# Altium PCB carrier_card.PcbDoc (part 1 of 2)
Units mil, origin at the board's own origin, x right, y up, seen from the top; angles counter-clockwise.
Board outline 4010 x 3799.91 mil, 4 copper layers (Top Layer, GND, VCC, Bottom Layer), stack 30.634 mil thick; 96 components, 162 nets, 584 pads, 200 vias.
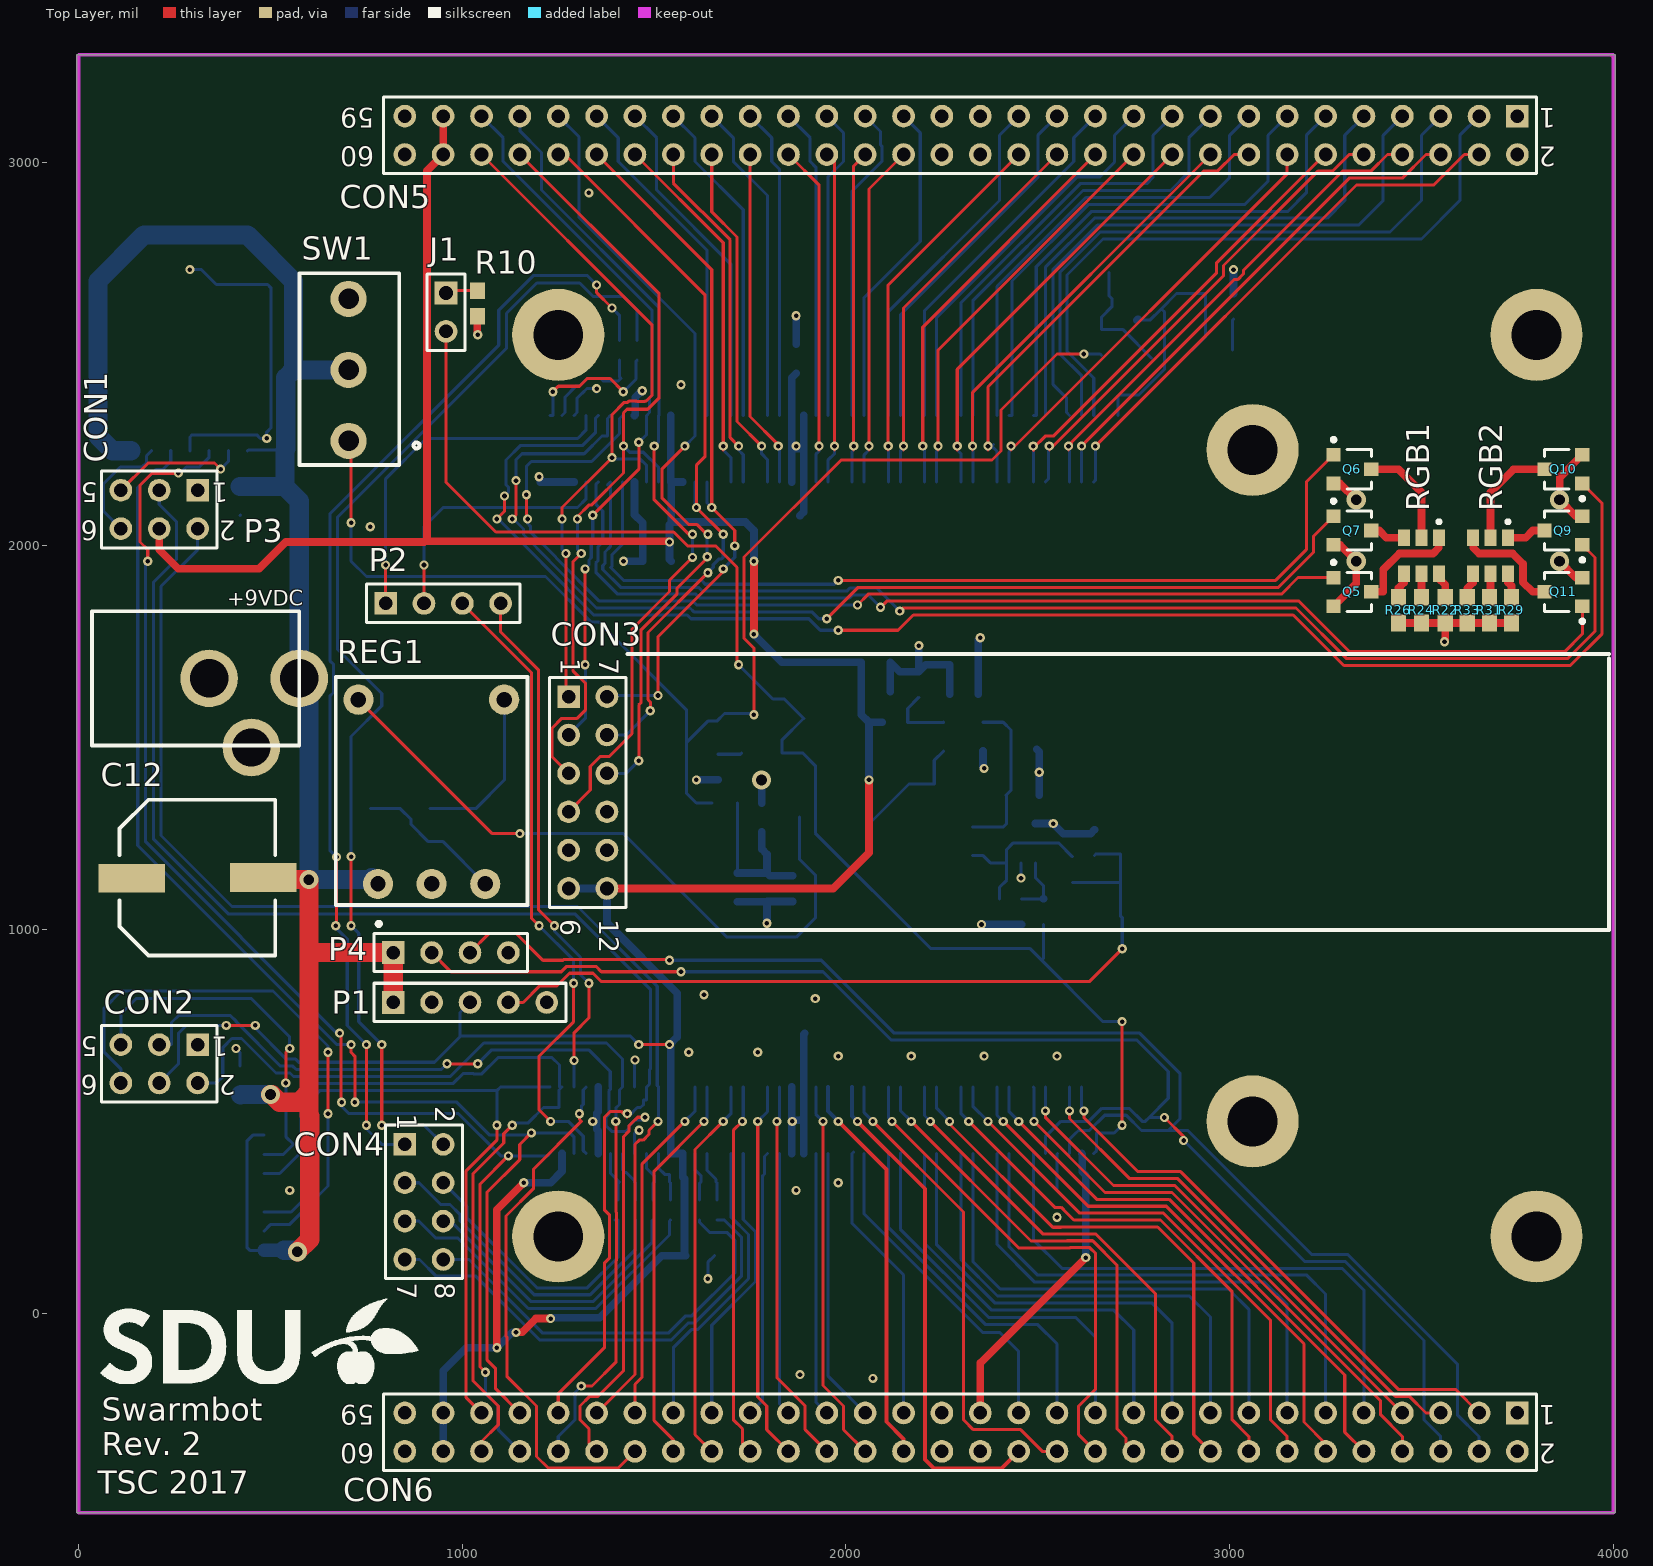
[diagram p0: Top Layer view]
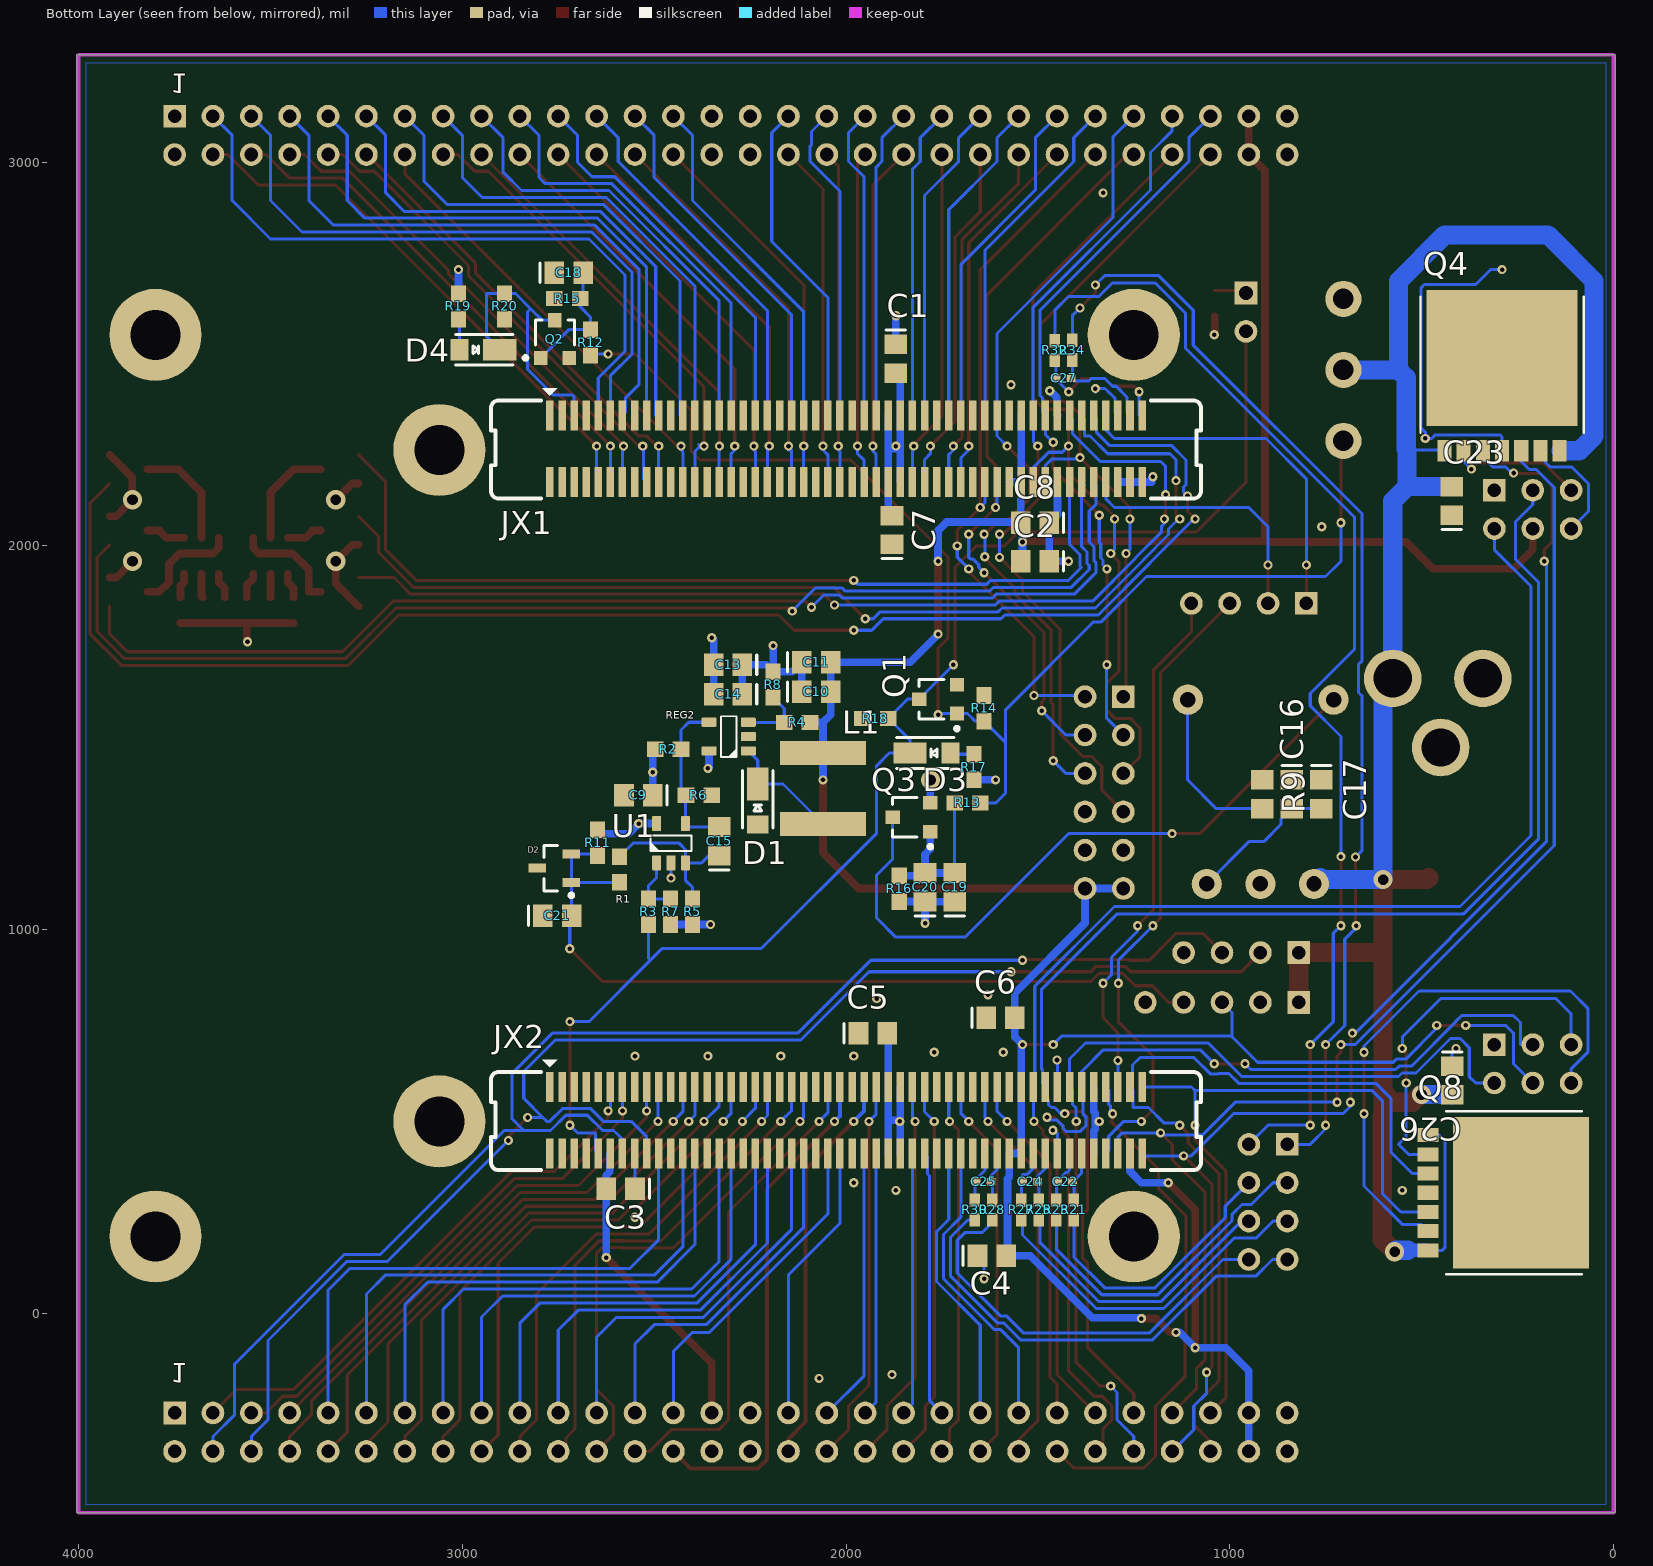
[diagram p1: Bottom Layer view, seen from below]
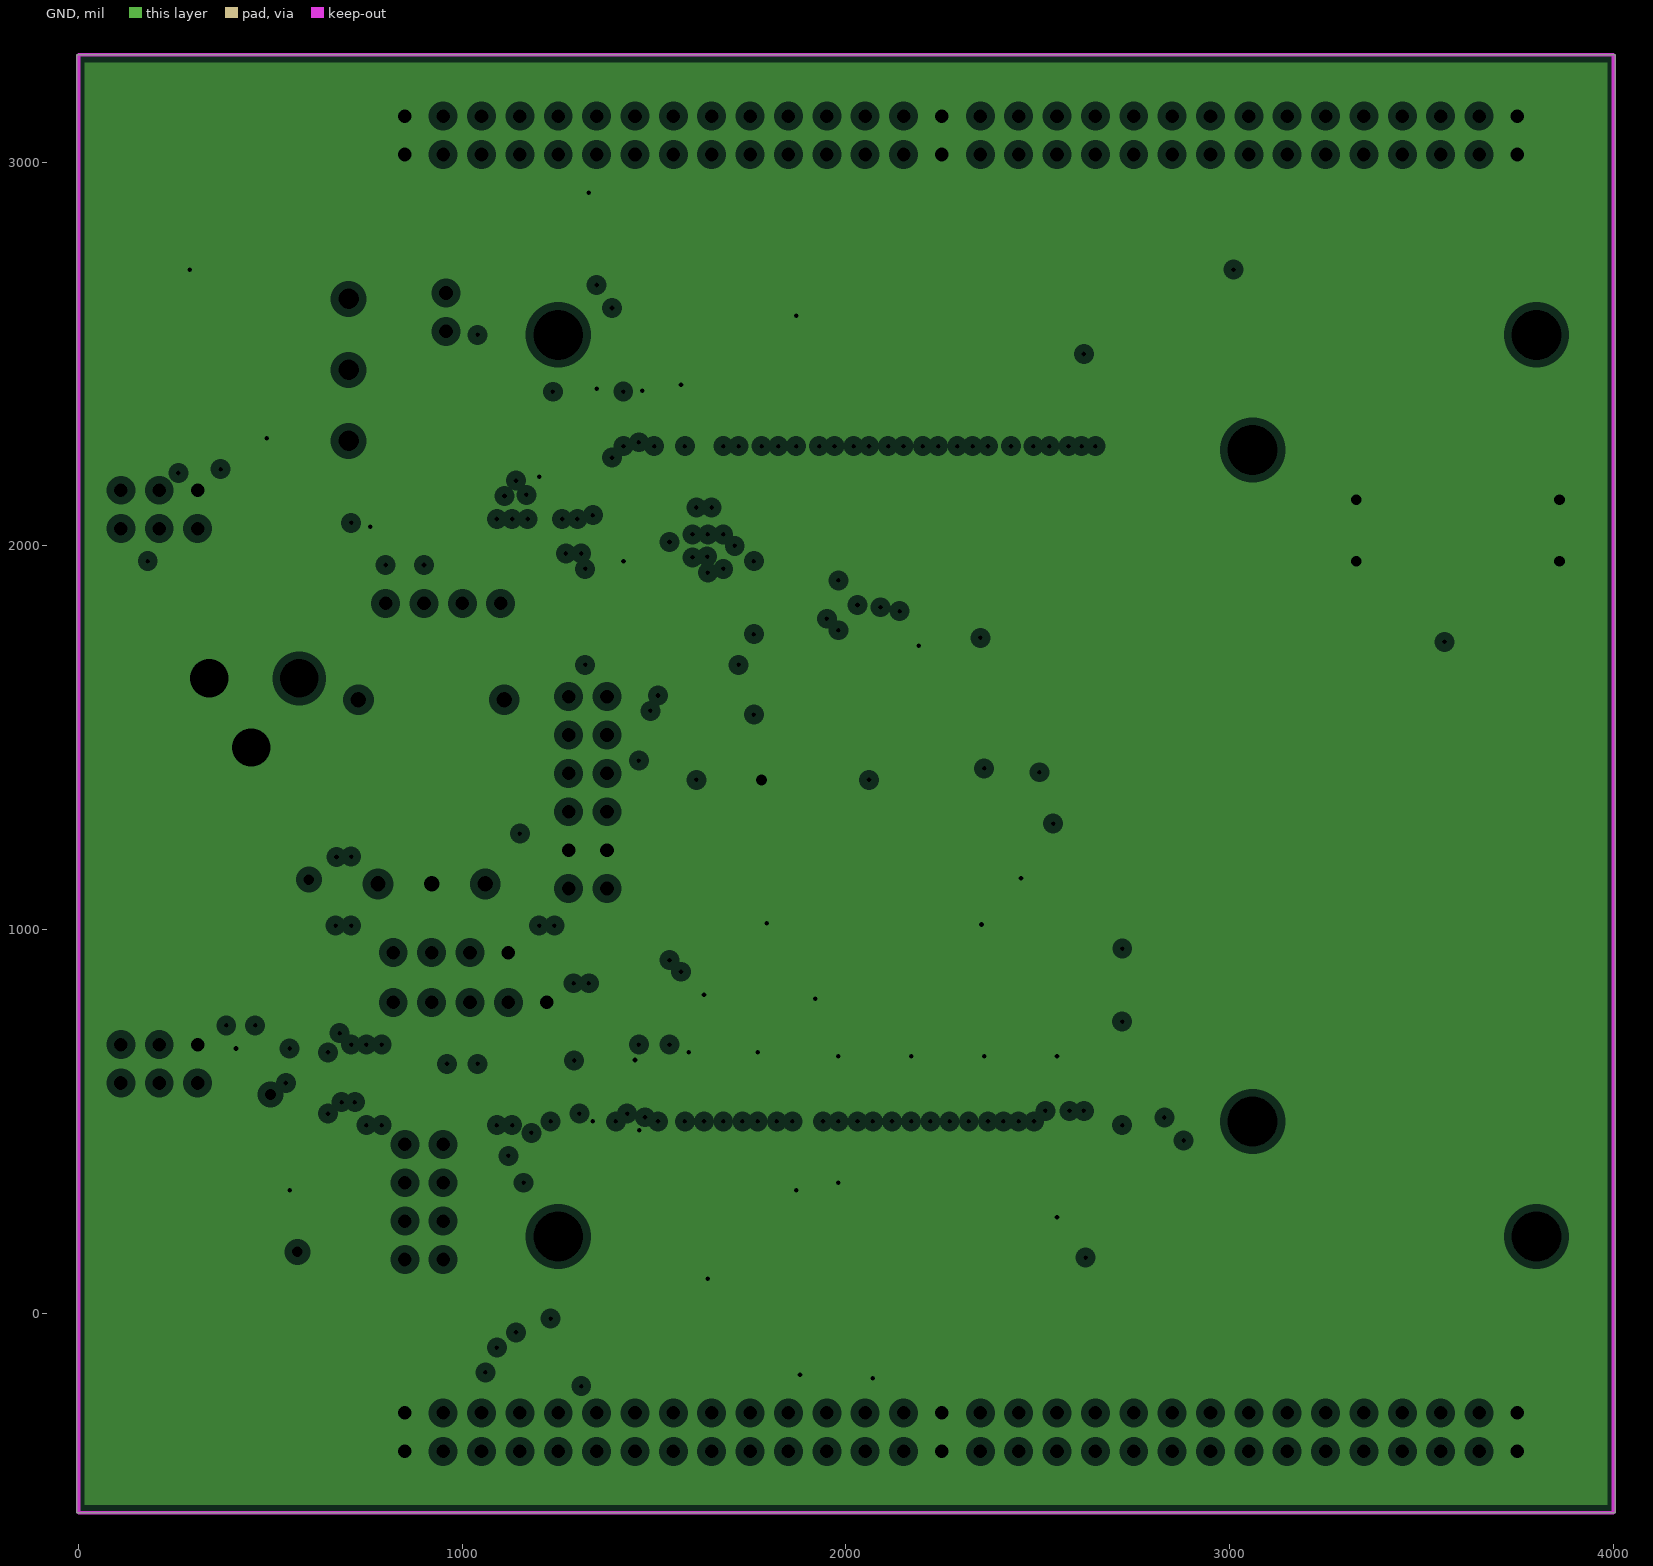
[diagram p2: GND, clearances drawn from the general rule]
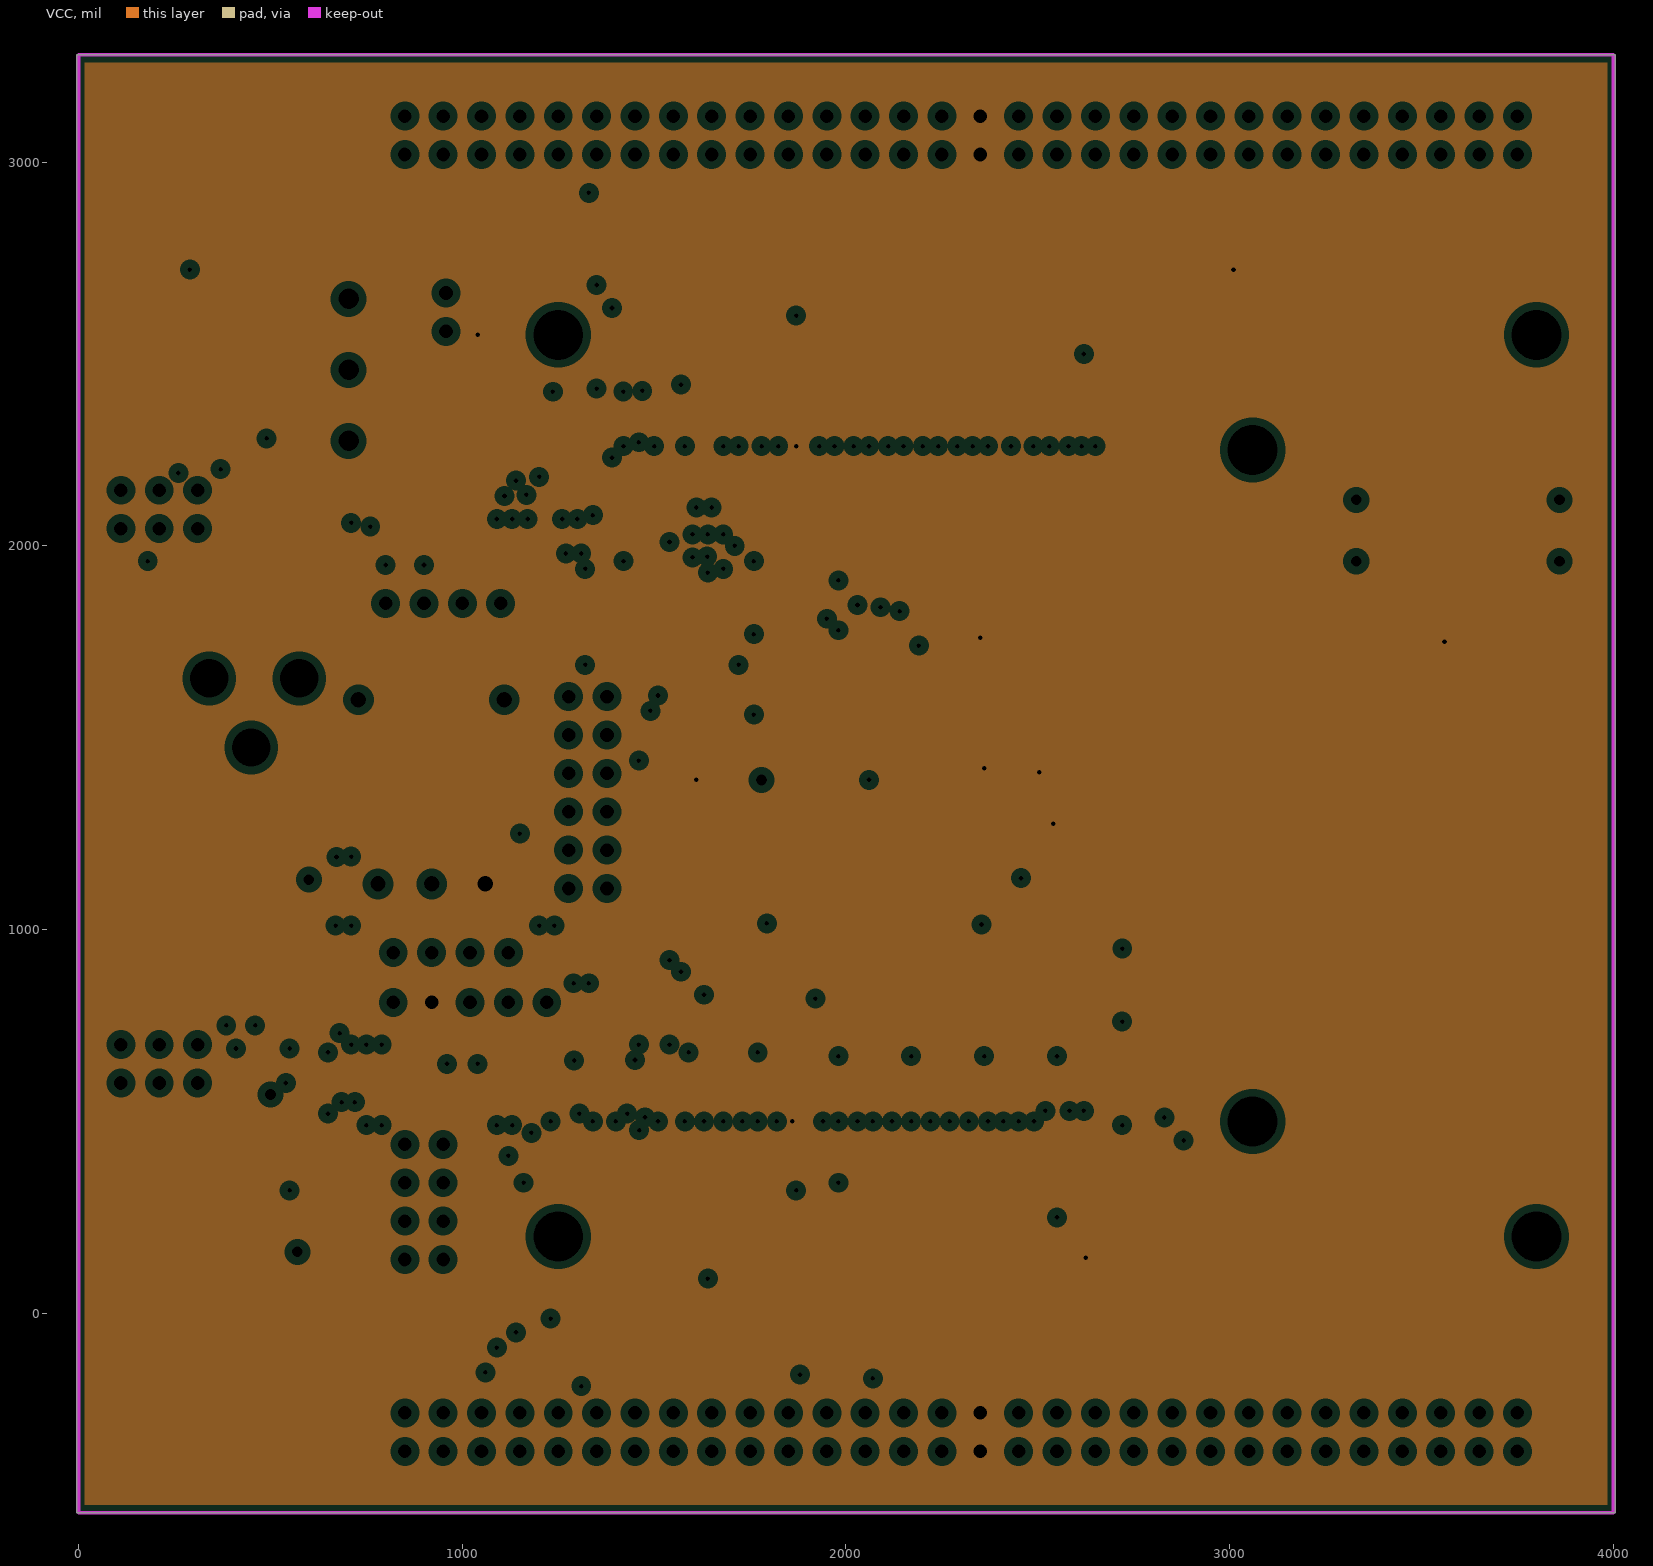
[diagram p3: VCC, clearances drawn from the general rule]

## Layer stack, top to bottom
Top Solder: solder mask 0.4, Solder Resist, Dk 3.5
Top Layer: signal copper 1.4
Dielectric1: core 10, FR-4, Dk 4.2
GND: plane copper 1.417, net GND
Dielectric 3: prepreg 5, Dk 4.2
VCC: plane copper 1.417, net VCC
Dielectric 2: core 10, Dk 4.2
Bottom Layer: signal copper 1.4
Bottom Solder: solder mask 0.4, Solder Resist, Dk 3.5

## Board outline
-5,-520 -5,3279.89 4005,3279.91 4005,-520

## Design rules (kind name [scope] priority, off if disabled: settings)
Clearance [All] p1: gap=10 ignorepadtopadclearanceinfootprint=FALSE except(0: Arc-Hole Track-Hole SMDPad-Hole THPad-Hole Via-Hole Fill-Hole Poly-Hole Region-Hole Text-Hole)
FabricationTestPointUsage TestPointUsage [All] p1: valid=0 allowmultiple=FALSE
FabricationTestpoint Testpoint [All] p1: side=3 testpointundercomponent=TRUE minsize=40 maxsize=100 preferedsize=60 minholesize=0 maxholesize=40 preferedholesize=32 testpointgrid=1 allowsidetop=TRUE allowsidebottom=TRUE usegrid=TRUE gridtolerance=0.01
HoleSize HoleSize_1 [IsVia And InAnyNet And InLayerClass('All Layers')] p1: absolutevalues=TRUE maxlimit=100 minlimit=15 maxpercent=80.000 minpercent=20.000
HoleSize [All] p2: absolutevalues=TRUE maxlimit=150 minlimit=1 maxpercent=80.000 minpercent=20.000
PlaneClearance [All] p1: clearance=20
PlaneConnect [All] p1: planeconnectstyle=Relief reliefexpansion=20 reliefentries=4 reliefconductorwidth=10 reliefairgap=10
PolygonConnect [All] p1: connectstyle=Relief reliefconductorwidth=10 reliefentries=4 polygonreliefangle="90 Angle" airgapwidth=10
RoomDefinition carrier_card_s3 [InComponentClass('carrier_card_s3')] p1 off: confinementstyle=ConfineIn formatcopy=TRUE lockcomponents=FALSE outline -1945.64,-1157.29 7345.7,-1157.29 7345.7,-251.78 -1945.64,-251.78
RoomDefinition carrier_card_s2 [InComponentClass('carrier_card_s2')] p2 off: confinementstyle=ConfineIn formatcopy=TRUE lockcomponents=FALSE outline 3579.53,5587.41 13973.24,5587.41 13973.24,6414.18 3579.53,6414.18
RoomDefinition carrier_card [InComponentClass('carrier_card')] p3 off: confinementstyle=ConfineIn formatcopy=TRUE lockcomponents=FALSE outline 3540.16,75.59 7870.87,75.59 7870.87,5548.04 3540.16,5548.04
RoutingVias RoutingVias_1 [IsVia And InAnyNet And InLayerClass('All Layers')] p1: holewidth=28 width=50 viastyle="Through Hole" minholewidth=28 minwidth=50 maxholewidth=28 maxwidth=50
RoutingVias [All] p2: holewidth=12 width=24 viastyle="Through Hole" minholewidth=12 minwidth=24 maxholewidth=12 maxwidth=24
SilkToSolderMaskClearance SilkscreenOverComponentPads [IsPad] p1: minsilkscreentomaskgap=10 clearancetoexposedcopper=TRUE
SolderMaskExpansion [All] p1: expansion=4
Width [All] p1: maxlimit=50 minlimit=8 preferedwidth=8 minimp=50.000000 maximp=50.000000 favimp=50.000000
24 further rules are at their usual default settings.

## Classes and differential pairs
component class carrier_card_s2: C9 C10 C11 C12 C13 C14 C15 C16 C17 C18 C19 C20 C21 D1 D2 D3 D4 J1 L1 Q1 Q2 Q3 R1 R2 R3 R4 R5 R6 R7 R8 R9 R10 R11 R12 R13 R14 R15 R16 R17 R18 R19 R20 REG1 REG2 SW1 U1
component class carrier_card_s3: C22 C23 C24 C25 C26 C27 P3 P4 Q4 Q5 Q6 Q7 Q8 Q9 Q10 Q11 R21 R22 R23 R24 R25 R26 R27 R28 R29 R30 R31 R32 R33 R34 RGB1 RGB2
component class carrier_card: C1 C2 C3 C4 C5 C6 C7 C8 CON1 CON2 CON3 CON4 CON5 CON6 JX1 JX2 P1 P2

## Components (designator, comment, footprint, x,y, rotation, side; value= is the part's Value field where it differs from the comment)
C1 "C0805" 0805 1870,2487.72 r270 bottom value=22uF
C2 "C0805" 0805 1507.4,1960 r0 bottom value=22uF
C3 "C0805" 0805 2587.4,324.28 r0 bottom value=22uF
C4 "C0805" 0805 1620,150 r180 bottom value=22uF
C5 "C0805" 0805 1930,730 r180 bottom value=100nF
C6 "C0805" 0805 1597.4,770 r180 bottom value=100nF
C7 "C0805" 0805 1880,2041.31 r90 bottom value=100nF
C8 "C0805" 0805 1507.4,2060 r0 bottom value=100nF
C9 "C0805" 0805 2541.28,1350.04 r0 bottom value=100nF
C10 "C0805" 0805 2077.56,1620 r180 bottom value=22uF
C11 "C0805" 0805 2077.56,1697.06 r180 bottom value=100nF
C12 "20SVP150M" 20SVP150M_FP 309.5,1135.5 r180 top value=100pF
C13 "C0805" 0805 2307.4,1690 r0 bottom value=100nF
C14 "C0805" 0805 2307.4,1612.94 r0 bottom value=22uF
C15 "C0805" 0805 2330,1230 r90 bottom value=100nF
C16 "C0805" 0805 838.44,1352.6 r270 bottom value=100nF
C17 "C0805" 0805 761.37,1352.6 r270 bottom value=22uF
C18 "C0805" 0805 2722.6,2711.81 r180 bottom value=100nF
C19 "C0805" 0805 1716.84,1110 r90 bottom value=100nF
C20 "C0805" 0805 1793.9,1110 r90 bottom value=100nF
C21 "C0805" 0805 2752.6,1035.75 r180 bottom value=100nF
C22 "Cap Semi" 0402 1428.86,342.06 r180 bottom value=900pF
C23 "C0805" 0805 421,2116.97 r90 bottom value=100nF
C24 "Cap Semi" 0402 1520.31,342.06 r180 bottom value=900pF
C25 "Cap Semi" 0402 1641.52,342.06 r180 bottom value=900pF
C26 "C0805" 0805 420,606.5 r270 bottom value=100nF
C27 "Cap Semi" 0402 1433.07,2436.47 r0 bottom value=900pF
CON1 "Header 3X2" HDR2X3 310,2145 r180 top
CON2 "Header 3X2" HDR2X3 310,700 r180 top
CON3 "Header 6X2A" HDR2X6_CEN 1277,1607 r270 top
CON4 "Header 4X2 - ADC" HDR2X4 850,440 r270 top
CON5 "Header 30X2" HDR2X30 3750,3120 r180 top
CON6 "Header 30X2" HDR2X30 3750,-260 r180 top
D1 "18TQ045" POWERDI-123 2230,1339.08 r270 bottom
D2 "TL431AIDBZT" SOT-23_N 2760,1160 r0 bottom
D3 "18TQ045" POWERDI-123 1792.91,1459.93 r180 bottom
D4 "18TQ045" POWERDI-123 2942.53,2511 r0 bottom
J1 "Header 2" HDR1X2 957.49,2659 r270 top
JX1 "BERGSTAK 100P" FCI_BERGSTAK_100P 2771.65,2339.85 r180 bottom
JX2 "BERGSTAK 100P" FCI_BERGSTAK_100P 2771.65,589.35 r180 bottom
L1 "2.2uH" SRN5020-2R2Y_FP 2059.85,1274.96 r270 bottom
P1 "Header 5" HDR1X5 820,810 r0 top
P2 "Header 4" HDR1X4 800,1850 r0 top
P3 "dc_jack" "Power Jack" 575,1654.5 r270 top
P4 "Audio Header" HDR1X4 820,940 r0 top
Q1 "BSS138LT1G" SOT-23B 1760,1600.5 r90 bottom
Q2 "BSS138LT1G" SOT-23B 2758.6,2538.98 r180 bottom
Q3 "BSS138LT1G" SOT-23B 1829.21,1292.6 r90 bottom
Q4 "BD6222HFP" HRP7_N 290,2480.16 r180 bottom
Q5 "BSS138LT1G" SOT-23B 3320,1880 r270 top
Q6 "BSS138LT1G" SOT-23B 3320,2200 r270 top
Q7 "BSS138LT1G" SOT-23B 3320,2040 r270 top
Q8 "BD6222HFP" HRP7_N 250.72,313.95 r270 bottom
Q9 "BSS138LT1G" SOT-23B 3870,2040 r90 top
Q10 "BSS138LT1G" SOT-23B 3870,2200 r90 top
Q11 "BSS138LT1G" SOT-23B 3870,1880 r90 top
R1 "1K5" ERA-0603 2590,1156.54 r270 bottom
R2 "3K" ERA-0603 2463.46,1470 r0 bottom
R3 "1K" ERA-0603 2514.76,1046.62 r90 bottom
R4 "45K3" ERA-0603 2127.39,1540 r0 bottom
R5 "1K" ERA-0603 2400,1046.62 r90 bottom
R6 "100K" ERA-0603 2383.46,1350 r0 bottom
R7 "3K74" ERA-0603 2457.38,1046.54 r90 bottom
R8 "10K" ERA-0603 2190,1638.53 r270 bottom
R9 "348R1%" ERA-0805 915.5,1352.6 r270 bottom
R10 "1K" ERA-0603 1039.21,2631.91 r270 top
R11 "1K" ERA-0603 2647.56,1226.54 r90 bottom
R12 "1K" ERA-0603 2665.79,2530 r270 bottom
R13 "1K" ERA-0603 1683.46,1330 r180 bottom
R14 "3K92" ERA-0603 1640,1576.54 r270 bottom
R15 "3K92" ERA-0603 2726.54,2644.59 r180 bottom
R16 "3K92" ERA-0603 1861.12,1106.54 r90 bottom
R17 "220R" ERA-0603 1666.59,1423.46 r90 bottom
R18 "120R" ERA-0603 1923.46,1550 r180 bottom
R19 "680R" ERA-0603 3010,2624.07 r270 bottom
R20 "430R" ERA-0603 2890,2624.07 r90 bottom
R21 "100R" 2-0402 1406.18,268.99 r90 bottom
R22 "85R" ERA-0603 3561.88,1832.29 r270 top
R23 "100R" 2-0402 1451.75,268.99 r90 bottom
R24 "145R" ERA-0603 3500,1832.29 r270 top
R25 "100R" 2-0402 1497.31,268.99 r90 bottom
R26 "85R" ERA-0603 3440,1832.29 r270 top
R27 "100R" 2-0402 1542.88,268.99 r90 bottom
R28 "100R" 2-0402 1618.45,268.99 r90 bottom
R29 "85R" ERA-0603 3734.38,1832.29 r270 top
R30 "100R" 2-0402 1664.02,268.99 r90 bottom
R31 "145R" ERA-0603 3677,1832.29 r270 top
R32 "100R" 2-0402 1455.57,2509.54 r270 bottom
R33 "85R" ERA-0603 3619.26,1832.29 r270 top
R34 "100R" 2-0402 1410,2510.03 r270 bottom
REG1 "PTH08080WAH" PTH08080W_FP 920,1359 r90 top
REG2 "LMR10510XMF" SOT23-5 2305.77,1502.9 r0 bottom
RGB1 "RGB LED" RGB_LED 3500,1974.31 r180 top
RGB2 "RGB LED" RGB_LED 3680,1974.31 r180 top
SW1 "1101M2S3CQE2" 1101M2S3CQE2_FP 703.5,2458.5 r180 top
U1 "TLV2702" SOT23-5 2456,1225 r90 bottom

## Footprints (in the part's own frame and the unit in brackets; to place one, negate y for a bottom-side part, rotate by r counter-clockwise, add the part's x,y. Pads: shape width x height; smd on the part's side, far side on the other; paste and mask are expansions set on the pad)
2-0402 [mm] "Chip Resistor; Body 1 x 0.5 mm (LxW typ)"
  rect 0.9x0.7 smd: 1(-0.65,0) 2(0.65,0)
20SVP150M_FP [mm]
  rect 4.4x1.9 smd: 1(4.35,0.05) 2(-4.35,0)
  silkscreen extent -5.15,-5.15 5.15,5.15
0402 [mm] "Chip Capacitor, Body 1.0x0.5mm, IPC High Density"
  rect 0.6x0.5 smd: 1(-0.5,0) 2(0.5,0)
  body extent -0.55,-0.3 0.55,0.3, height 1.3
0805 [mm] "Chip Capacitor; Body 2.0 x 1.2 mm (LxW typ)"
  rect 1.3x1.5 smd: 1(-0.95,0) 2(0.95,0)
  silkscreen extent -1.9,-0.65 -1.9,0.65
1101M2S3CQE2_FP [mm]
  round 2.4 hole 1.36: 1(0,4.7) 2(0,0) 3(0,-4.7)
  silkscreen extent -4.7,-6.4 3.25,6.3
ERA-0603 [mm] "Chip Resistor; Body 1.6 x 0.8 mm (LxW typ)"
  rect 1.1x1 smd: 1(-0.85,0) 2(0.85,0)
ERA-0805 [mm] "Chip Resistor; Body 2 x 1.3 mm (LxW typ)"
  rect 1.3x1.5 smd: 1(-0.95,0) 2(0.95,0)
FCI_BERGSTAK_100P [mm]
  rect 0.5x2 smd: 1(0,0) 2(0,-4.4) 3(0.8,0) 4(0.8,-4.4) 5(1.6,0) 6(1.6,-4.4) 7(2.4,0) 8(2.4,-4.4) 9(3.2,0) 10(3.2,-4.4) 11(4,0) 12(4,-4.4) 13(4.8,0) 14(4.8,-4.4) 15(5.6,0) 16(5.6,-4.4) 17(6.4,0) 18(6.4,-4.4) 19(7.2,0) 20(7.2,-4.4) 21(8,0) 22(8,-4.4) 23(8.8,0) 24(8.8,-4.4) 25(9.6,0) 26(9.6,-4.4) 27(10.4,0) 28(10.4,-4.4) 29(11.2,0) 30(11.2,-4.4) 31(12,0) 32(12,-4.4) 33(12.8,0) 34(12.8,-4.4) 35(13.6,0) 36(13.6,-4.4) 37(14.4,0) 38(14.4,-4.4) 39(15.2,0) 40(15.2,-4.4) 41(16,0) 42(16,-4.4) 43(16.8,0) 44(16.8,-4.4) 45(17.6,0) 46(17.6,-4.4) 47(18.4,0) 48(18.4,-4.4) 49(19.2,0) 50(19.2,-4.4) 51(20,0) 52(20,-4.4) 53(20.8,0) 54(20.8,-4.4) 55(21.6,0) 56(21.6,-4.4) 57(22.4,0) 58(22.4,-4.4) 59(23.2,0) 60(23.2,-4.4) 61(24,0) 62(24,-4.4) 63(24.8,0) 64(24.8,-4.4) 65(25.6,0) 66(25.6,-4.4) 67(26.4,0) 68(26.4,-4.4) 69(27.2,0) 70(27.2,-4.4) 71(28,0) 72(28,-4.4) 73(28.8,0) 74(28.8,-4.4) 75(29.6,0) 76(29.6,-4.4) 77(30.4,0) 78(30.4,-4.4) 79(31.2,0) 80(31.2,-4.4) 81(32,0) 82(32,-4.4) 83(32.8,0) 84(32.8,-4.4) 85(33.6,0) 86(33.6,-4.4) 87(34.4,0) 88(34.4,-4.4) 89(35.2,0) 90(35.2,-4.4) 91(36,0) 92(36,-4.4) 93(36.8,0) 94(36.8,-4.4) 95(37.6,0) 96(37.6,-4.4) 97(38.4,0) 98(38.4,-4.4) 99(39.2,0) 100(39.2,-4.4)
  silkscreen extent -3.9,-5.5 43.1,1.8
HDR1X2 [mm] "Connector; Header; 2 Position"
  rect 1.5x1.5 hole 0.9: 1(0,0)
  round 1.5 hole 0.9: 2(2.54,0)
  silkscreen extent -1.27,-1.27 3.81,1.27
HDR1X4 [mm] "Connector; Header; 4 Position"
  rect 1.5x1.5 hole 0.9: 1(0,0)
  round 1.5 hole 0.9: 2(2.54,0) 3(5.08,0) 4(7.62,0)
  silkscreen extent -1.27,-1.27 8.89,1.27
HDR1X5 [mm] "Connector; Header; 5 Position"
  rect 1.5x1.5 hole 0.9: 1(0,0)
  round 1.5 hole 0.9: 2(2.54,0) 3(5.08,0) 4(7.62,0) 5(10.16,0)
  silkscreen extent -1.27,-1.27 11.43,1.27
HDR2X3 [mm] "Connector; Header; 3x2 Position"
  rect 1.5x1.5 hole 0.9: 1(0,0)
  round 1.5 hole 0.9: 2(0,2.54) 3(2.54,0) 4(2.54,2.54) 5(5.08,0) 6(5.08,2.54)
  silkscreen extent -1.27,-1.27 6.35,3.81
HDR2X4 [mm] "Connector; Header; 4x2 Position"
  rect 1.5x1.5 hole 0.9: 1(0,0)
  round 1.5 hole 0.9: 2(0,2.54) 3(2.54,0) 4(2.54,2.54) 5(5.08,0) 6(5.08,2.54) 7(7.62,0) 8(7.62,2.54)
  silkscreen extent -1.27,-1.27 8.89,3.81
HDR2X6_CEN [mm] "Connector; Header; 6x2 Position"
  rect 1.5x1.5 hole 0.9: 1(0,0)
  round 1.5 hole 0.9: 2(2.54,0) 3(5.08,0) 4(7.62,0) 5(10.16,0) 6(12.7,0) 7(0,2.54) 8(2.54,2.54) 9(5.08,2.54) 10(7.62,2.54) 11(10.16,2.54) 12(12.7,2.54)
  silkscreen extent -1.27,-1.27 13.97,3.81
HDR2X30 [mm] "Connector; Header; 30x2 Position"
  rect 1.5x1.5 hole 0.9: 1(0,0)
  round 1.5 hole 0.9: 2(0,2.54) 3(2.54,0) 4(2.54,2.54) 5(5.08,0) 6(5.08,2.54) 7(7.62,0) 8(7.62,2.54) 9(10.16,0) 10(10.16,2.54) 11(12.7,0) 12(12.7,2.54) 13(15.24,0) 14(15.24,2.54) 15(17.78,0) 16(17.78,2.54) 17(20.32,0) 18(20.32,2.54) 19(22.86,0) 20(22.86,2.54) 21(25.4,0) 22(25.4,2.54) 23(27.94,0) 24(27.94,2.54) 25(30.48,0) 26(30.48,2.54) 27(33.02,0) 28(33.02,2.54) 29(35.56,0) 30(35.56,2.54) 31(38.1,0) 32(38.1,2.54) 33(40.64,0) 34(40.64,2.54) 35(43.18,0) 36(43.18,2.54) 37(45.72,0) 38(45.72,2.54) 39(48.26,0) 40(48.26,2.54) 41(50.8,0) 42(50.8,2.54) 43(53.34,0) 44(53.34,2.54) 45(55.88,0) 46(55.88,2.54) 47(58.42,0) 48(58.42,2.54) 49(60.96,0) 50(60.96,2.54) 51(63.5,0) 52(63.5,2.54) 53(66.04,0) 54(66.04,2.54) 55(68.58,0) 56(68.58,2.54) 57(71.12,0) 58(71.12,2.54) 59(73.66,0) 60(73.66,2.54)
  silkscreen extent -1.27,-1.27 75.06,3.81
HRP7_N [mm] "HRP, 7-Leads, 1.27mm Pitch, Body 9x9.8mm, Lead Span 10.7mm, IPC Medium Density"
  rect 0.93x1.4 smd: 1(-3.81,-5.9) 2(-2.54,-5.9) 3(-1.27,-5.9) 4(0,-5.9) 5(1.27,-5.9) 6(2.54,-5.9) 7(3.81,-5.9)
  rect 10x9 smd: Heatsink(0,0.25)
  silkscreen extent -5.4,-4.7 5.4,4.3, body extent -4.88,-4.7 4.88,4.3, height 2
"Power Jack" [mil]
  round 150 hole 100: 1(0,0) 2(0,-235) 3(180,-125)
  silkscreen extent -175,-540 175,0
POWERDI-123 [mm]
  rect 1.2x1.4 smd: 1(1.651,0)
  rect 2.2x1.4 smd: 2(-1.016,0)
  silkscreen extent -1.91,-1.02 1.9,1.02, body extent -1.95,-0.96 1.95,0.97, height 1
PTH08080W_FP [mm]
  round 2 hole 1.02: 1(-6.1,3.55) 2(-6.1,0) 3(-6.1,-3.55) 4(6.1,-4.8) 5(6.1,4.85)
  silkscreen extent -8.89,-6.35 7.6,6.35
RGB_LED [mm]
  rect 0.8x1.1 smd: 1(-1.15,-1.2) 2(0,-1.2) 3(1.15,-1.2) 4(1.15,1.2) 5(0,1.2) 6(-1.15,1.2)
  silkscreen extent -1.25,-2.35 -1.05,-2.15
SOT23-5 [mm]
  round 0.5 on Mech15: 0(0,0)
  rrect25% 1x0.6 smd: 1(-1.3,0.95) 2(-1.3,0) 3(-1.3,-0.95) 4(1.3,-0.95) 5(1.3,0.95)
  silkscreen extent -0.51,-1.35 0.51,1.35, body extent -1.4,-1.45 1.4,1.45, height 1.44
SOT-23_N [mm] "SOT23, 3-Leads, Body 2.9x1.3mm, Pitch 0.95mm, Lead Span 2.5mm, IPC Medium Density"
  rect 1.15x0.6 smd: 1(-1.125,0.95) 2(-1.125,-0.95) 3(1.125,0)
  silkscreen extent -1.25,-1.5 0.7,1.92, body extent -0.7,-1.5 0.7,1.5, height 1.1
SOT-23B [mm] "SOT-23; 3 Leads; Body 3.0 x 2.6 mm, inc. leads (LxW max)"
  rect 0.9x0.95 smd: 1(-0.95,-1.25) 2(0.95,-1.25) 3(0,1.25)
  silkscreen extent -2.07,-1.37 1.3,1.25
SRN5020-2R2Y_FP [mm]
  rect 1.6x5.7 smd: 1(0,0) 2(-4.7,0)

## Part data
C1 C2 C3 C4 C5 C6 C7 C8 C9 C10 C11 C13 C14 C15 C16 C17 C18 C19 C20 C21 C23 C26: "Ceramic Chip Capacitor - Standard", PackageDocument=Mar-2001, Code_IPC=2012[0805], Code_JEITA=0805, ComponentLink1Description="Manufacturer Link", ComponentLink1URL=http://www.kemet.com/, ComponentLink2Description=Datasheet, ComponentLink2URL=http://www.kemet.com/kemet/web/homepage/kechome.nsf/vapubfilesname/F3102TA.pdf/$file/F3102TA.pdf, DatasheetDocument=Mar-2001, LatestRevisionDate=19-Mar-2004, LatestRevisionNote="Silkscreen size reduced.", Note="Footprint corresponds to dimensions for bulk cassette packaging. This case size has tightened tolerances.", PackageReference=0805, Published=17-Jul-2002, Publisher="Altium Limited"
C12 C22 C24 C25 C27: "Capacitor (Semiconductor SIM Model)", LatestRevisionDate=29-May-2009, LatestRevisionNote="IPC-7351 Footprint Added.", PackageDescription="Chip Capacitor", PackageReference=C1206, Published=8-Jun-2000, Publisher="Altium Limited"
CON1 CON2: "Header, 3-Pin, Dual row", LatestRevisionDate=17-Jul-2002, LatestRevisionNote="Re-released for DXP Platform.", Publisher="Altium Limited"
CON3: "Header, 6-Pin, Dual row", LatestRevisionDate=17-Jul-2002, LatestRevisionNote="Re-released for DXP Platform.", Publisher="Altium Limited"
CON4: library part "Header 4X2", "Header, 4-Pin, Dual row", LatestRevisionDate=17-Jul-2002, LatestRevisionNote="Re-released for DXP Platform.", Publisher="Altium Limited"
CON5 CON6: "Header, 30-Pin, Dual row", LatestRevisionDate=17-Jul-2002, LatestRevisionNote="Re-released for DXP Platform.", Publisher="Altium Limited"
D1 D3 D4: "Schottky Rectifier", ComponentLink1Description="Manufacturer Link", ComponentLink1URL=http://www.irf.com/, ComponentLink2Description=Datasheet, ComponentLink2URL=http://www.irf.com/product-info/datasheets/data/18tq.pdf, DatasheetVersion=Dec-1997, LatestRevisionDate=17-Jul-2002, LatestRevisionNote="Re-released for DXP Platform.", Note="Terminal 2 is the TAB and is electrically connected to the cathode", PackageDescription="TO, Thru-Hole, Vertical, Heatsink Mounted; 3 In-Line Leads (1 Absent); Pitch 2.54 mm", PackageReference=TO-220AC, PackageVersion=Feb-1998, Published=8-Jun-2000, Publisher="Altium Limited"
D2: "Variable voltage  reference", ComponentLink1Description="Manufacturer Link", ComponentLink1URL=http://www.infineon.com/, ComponentLink2Description=Datasheet, ComponentLink2URL=http://www.infineon.com/upload/Document/cmc_upload/documents/012/5331/bas16series.pdf, DatasheetVersion=Oct-1999, LatestRevisionDate=29-May-2009, LatestRevisionNote="IPC-7351 Footprint Added.", Note="Pin 2 is not connected and not drawn.", PackageDescription="3-Pin SOT-23 Package 0.95 mm Pitch, 2.5 mm Lead Span", PackageReference=SOT-23, PackageVersion=Sep-2001, Published=21-Mar-2003, Publisher="Altium Limited"
J1: "Header, 2-Pin", LatestRevisionDate=17-Jul-2002, LatestRevisionNote="Re-released for DXP Platform.", Publisher="Altium Limited"
JX1 JX2: "100p connector, BERGSTAK"
L1: library part SRN5020-2R2Y, "SRN5020-2R2Y", Manufacturer 1="Cooper Bussmann", Manufacturer Part Number 1=DR73-100-R, Package / Case=5.0x5.0x4.5mm, Ratings="2.1 A", Supplier Part Number 1=513-1129-1-ND, Tolerance=±20%, ComponentLink1Description=http://www.cooperindustries.com/content/dam/public/bussmann/Electronics/Resources/Data%20Sheets/Bus_Elx_DS_4315_DR_Series.pdf, ComponentLink1URL=http://www.cooperindustries.com/content/dam/public/bussmann/Electronics/Resources/Data%20Sheets/Bus_Elx_DS_4315_DR_Series.pdf, Material="ferrite shielded", SCDType=spec, Supplier 1=Digi-Key
P1: "Header, 5-Pin", LatestRevisionDate=17-Jul-2002, LatestRevisionNote="Re-released for DXP Platform.", Publisher="Altium Limited"
P2: "Header, 4-Pin", LatestRevisionDate=17-Jul-2002, LatestRevisionNote="Re-released for DXP Platform.", Publisher="Altium Limited"
P4: library part "Header 4", "Header, 4-Pin", LatestRevisionDate=17-Jul-2002, LatestRevisionNote="Re-released for DXP Platform.", Publisher="Altium Limited"
Q1 Q2 Q3 Q5 Q6 Q7 Q9 Q10 Q11: "N-Channel MOSFET", LatestRevisionDate=17-Jul-2002, LatestRevisionNote="Re-released for DXP Platform.", PackageDescription="TO, Flat Index; 3 In-Line, Axial Leads; Body Dia. 4.6mm; Lead Dia. 0.5 mm (max)", PackageReference=E3, PackageVersion=1995/1996, Published=8-Jun-2000, Publisher="Altium Limited"
R1 R2 R3 R4 R5 R6 R7 R8 R10 R11 R12 R13 R14 R15 R16 R17 R18 R19 R20 R22 R24 R26 R29 R31 R33: library part ERA3Y, "Rectangular Thick Film Chip Resistor, 10 Ohm to 330k Ohm Range, 0.1% and 0.5% Tolerance, 0603 Size, 0.063 W", PackageDocument=Mar-2003, Code_IPC="1608 [0603]", ComponentLink1Description="Manufacturer Link", ComponentLink1URL=http://www.panasonic.com/industrial/components/resistive_products.htm, ComponentLink2Description=Datasheet, ComponentLink2URL=http://www.panasonic.com/industrial/components/pdf/AOA0000CE8.pdf, LatestRevisionDate=19-Mar-2004, LatestRevisionNote="Silkscreen size reduced.", Note="If flow soldering, adjust pad width of PCB Footprint to 0.7 - 0.8 times the width of the resistor.", PackageReference=ERA-0603, Published=17-Dec-2003, Publisher="Altium Limited"
R9: library part ERA6Y, "Rectangular Thick Film Chip Resistor, 10 Ohm to 1M Ohm Range, 0.1% and 0.5% Tolerance, 0805 Size, 0.1 W", PackageDocument=Mar-2003, Code_IPC="2012 [0805]", ComponentLink1Description="Manufacturer Link", ComponentLink1URL=http://www.panasonic.com/industrial/components/resistive_products.htm, ComponentLink2Description=Datasheet, ComponentLink2URL=http://www.panasonic.com/industrial/components/pdf/AOA0000CE8.pdf, LatestRevisionDate=19-Mar-2004, LatestRevisionNote="Silkscreen size reduced.", Note="If flow soldering, adjust pad width of PCB Footprint to 0.7 - 0.8 times the width of the resistor.", PackageReference=ERA-0805, Published=17-Dec-2003, Publisher="Altium Limited"
R21 R23 R25 R27 R28 R30 R32 R34: library part ERJ2GE, "Thick Film Chip Resistor, 1 Ohm to 2.2M Ohm Range, 5% Tolerance, 0402 Size, 0.063 W", PackageDocument=Mar-2003, Code_IPC="1005 [0402]", ComponentLink1Description="Manufacturer Link", ComponentLink1URL=http://www.panasonic.com/industrial/components/resistive_products.htm, ComponentLink2Description=Datasheet, ComponentLink2URL=http://www.panasonic.com/industrial/components/pdf/AOA0000CE1.pdf, LatestRevisionDate=19-Mar-2004, LatestRevisionNote="Silkscreen size reduced.", Note="If flow soldering, adjust pad width of PCB Footprint to 0.7 - 0.8 times the width of the resistor.", PackageReference=2-0402, Published=17-Dec-2003, Publisher="Altium Limited"
RGB1 RGB2: library part "LTRB R8SF"
U1: library part LMV331QDBVRQ1, "IC SMD AMP+COMPAR Combo SOIC-8", Manufacturer 1="Texas Instruments", Manufacturer Part Number 1=TLV2702ID, Package / Case="8-SOIC (0.154\", 3.90mm Width)", Supplier Part Number 1=296-12503-5-ND, Voltage - Supply="2.7 V ~ 16 V, ±1.35 V ~ 8 V", SCDType=undef, Supplier 1=Digi-Key

## Free pads (board coordinates)
  round 240 hole 130: 2(3800,200) 3(3800,2550) 4(1250,2550) 5(1250,200) 6(3060,500) 7(3060,2250)

## Via types
v1: diameter 24, hole 12, Top Layer to Bottom Layer, 192 vias
v2: diameter 50, hole 28, Top Layer to Bottom Layer, 8 vias

## Nets (pads, with @x,y where several pads share a name; then routed paths per layer and width w, separated by ;. In a path a pad name is that pad's centre, name@x,y a point inside that pad or via, vN(x,y) a via of type N, cw(c..) or ccw(c..) an arc to the next point about the centre after c; other vN are vias at no path point)
2V5REF: C21.2 D2.1 D2.2 P1.4 R1.2 R11.1 | length 2121.4
  Top Layer w8: P1.4@1120,810 1158.44,810 1201.97,853.53 1246.76,853.53 1279.23,886 1340.77,886 1362.77,864 2634,864 v1(2720,950)
  Bottom Layer w8: R1.2@2590,1123.07 2714.22,1123.07 D2.1@2715.2,1122.09 ; R11.1@2647.56,1193.07 2651.9,1197.4 D2.2@2715.71,1197.4 D2.1@2715.71,1122.6 D2.1@2715.2,1122.09 ; v1(2720,950) 2720,1030.95 C21.2@2715.2,1035.75 D2.1@2715.2,1122.09
BUZ_PWM0: CON6.4 JX2.14 P4.3 | length 3778.9
  Top Layer w8: P4.3@1020,940 1070,990 1140,990 1210,920 1262.32,920 1264.32,922 1538,922 v1(1540,920)
  Bottom Layer w8: v1(1540,920) 1935.46,920 2125.46,730 2765.46,730 2870,625.46 2870,506 2840,476 ; JX2.14@2582.67,416.12 2582.67,453.64 2598.53,469.49 2599.49,469.49 2606,476 2634.37,476 2674.37,516 2730.31,516 2770.31,476 2840,476 ; CON6.4@3650,-360 3650,-321.56 3593.53,-265.08 3593.53,-132.62 3307.91,153 3213.77,153 2890.77,476 2840,476
BUZ_PWM1: CON6.6 JX2.18 P4.2 | length 3833.6
  Top Layer w8: P4.2@920,940 970,890 1257.77,890 1271.77,904 1348.23,904 1362.23,890 v1(1570,890) ; v1(2830,510) 2880,460 v1(2880,450)
  Bottom Layer w8: v1(1570,890) 1940,890 2118,712 2758,712 2840,630 2840,560 2790,510 ; JX2.18@2519.68,416.12 2519.68,459.68 2560,500 2632.91,500 2666.91,534 2737.77,534 2771.77,500 2780,500 2790,510 ; v1(2830,510) 2790,510 ; v1(2880,450) 3195,135 3300.46,135 3506.47,-71.02 3506.47,-278.03 3550,-321.56 CON6.6@3550,-360
DCDC_EN: Q3.3 REG1.5 | length 1748.4
  Top Layer w8: REG1.5@729.06,1599.16 1078.21,1250 v1(1150,1250)
  Bottom Layer w8: v1(1150,1250) 1150.53,1250.53 1419.47,1250.53 1690,980 1870,980 1920,1030 1920,1142.26 1878.43,1183.84 Q3.3@1878.43,1292.6
ENC0A: CON1.2 CON6.49 JX2.81 | length 3482.5
  Top Layer w8: CON6.49@1350,-260 1450,-160 1450,440 1461.07,451.07 1471.38,451.07 1486.61,466.3 1486.61,476.61 v1(1510,500)
  Bottom Layer w8: CON1.2@310,2045 310,1990 214.53,1894.53 214.53,1244.97 399.5,1060 1300,1060 1508,852 1508,593.16 JX2.81@1511.81,589.35 1511.81,501.81 v1(1510,500)
ENC0B: CON1.3 CON6.51 JX2.83 | length 3694.3
  Top Layer w8: CON6.51@1250,-260 1250,-210 1370,-90 1370,130.5 1384,144.5 1384,255.51 1370,269.5 1370,510 1386,526 1414,526 1429.64,510.36 v1(1429.64,520.36)
  Bottom Layer w8: CON1.3@210,2145 210,2107.97 254.53,2063.44 254.53,1964.53 194.53,1904.53 194.53,1236.69 391.21,1040 1294.54,1040 1490,844.54 1490,636.55 1487.96,634.52 1487.96,597 JX2.83@1480.31,589.35 1480.31,556 1472.66,556 1472.66,544.18 1464.46,535.98 1456.08,535.98 1436.18,516.08 1430,516.08 1429.64,516.44 v1(1429.64,520.36)
ENC1A: CON2.2 CON6.52 JX2.87 | length 2405
  Top Layer w8: v1(1310,-190) 1338,-190 1400,-128 1400,135.04 1402,137.04 1402,262.96 1400,264.96 v1(1400,500)
  Bottom Layer w8: CON2.2@310,600 358.83,600 375.47,616.64 375.47,692.24 399.23,716 424.23,716 514.23,626 550.77,626 559.77,617 968.79,617 1056.11,704.32 1375.68,704.32 1417.32,662.68 JX2.87@1417.32,589.35 1409.67,581.7 1409.67,544.18 1401.46,535.98 1400,535.98 v1(1400,500) ; CON6.52@1250,-360 1250,-321.56 1293.53,-278.03 1293.53,-206.47 v1(1310,-190)
ENC1B: CON2.3 CON6.50 JX2.89 | length 2603.4
  Top Layer w8: v1(960,650) v1(1040,650) ; CON6.50@1350,-360 1330,-340 1330,-301.56 1306.47,-278.03 1306.47,-241.97 1331.97,-216.47 1353.53,-216.47 1420,-150 1420,460 1434,474 1434,487.94 1440.41,494.36 1456.81,510.75 v1(1476,510.75)
  Bottom Layer w8: CON2.3@210,700 242,700 242,757.46 260.54,776 395.42,776 410.65,760.77 410.65,759.35 526,644 558.23,644 567.23,635 945,635 v1(960,650) ; v1(1040,650) 1076.32,686.32 1329.13,686.32 1385.46,630 1385.46,589.72 JX2.89@1385.82,589.35 1385.82,583.31 1382,579.49 1382,518.77 1374,510.77 1374,489.23 1389.23,474 1426.75,474 1434,481.25 1434,487.23 1440.77,494 1449.84,503.07 1473.84,503.07 1476,505.23 v1(1476,510.75)
GND: C1.1 C2.1 C3.1 C4.1 C5.1 C6.1 C7.1 C8.1 C9.2 C10.1 C11.1 C12.1 C13.1 C14.1 C16.1 C17.1 C18.1 C19.1 C20.1 C21.1 C23.1 C26.1 CON1.1 CON2.1 CON3.5 CON3.11 CON5.1 CON5.2 CON5.31 CON5.32 CON5.59 CON5.60 CON6.1 CON6.2 CON6.31 CON6.32 CON6.59 CON6.60 D1.1 D2.3 JX1.15 JX1.16 JX1.21 JX1.22 JX1.27 JX1.28 JX1.33 JX1.34 JX1.39 JX1.40 JX1.45 JX1.46 JX1.51 JX1.52 JX1.65 JX1.66 JX1.71 JX1.72 JX1.77 JX1.85 JX1.86 JX1.95 JX1.96 JX1.98 JX1.100 JX2.15 JX2.16 JX2.21 JX2.22 JX2.27 JX2.28 JX2.33 JX2.34 JX2.39 JX2.40 JX2.45 JX2.46 JX2.51 JX2.52 JX2.65 JX2.66 JX2.71 JX2.72 JX2.77 JX2.85 JX2.86 JX2.91 JX2.92 P1.5 P3.2 P3.3 P4.4 Q1.2 Q2.2 Q3.2 Q4.4 Q5.2 Q6.2 Q7.2 Q8.4 Q9.2 Q10.2 Q11.2 R5.1 R6.1 R7.1 R8.1 R9.1 R14.1 R15.1 R16.1 R18.1 R20.1 REG1.2 REG2.2 U1.2 | length 3428.8
  Top Layer w20: Q5.2@3270.79,1842.6 3330,1901.81 v2(3330,1960) 3287.4,2002.6 Q7.2@3270.79,2002.6 ; Q6.2@3270.79,2162.6 3287.4,2162.6 v2(3330,2120) ; v2(3860,1960) 3902.6,1917.4 Q11.2@3919.21,1917.4 ; Q9.2@3919.21,2077.4 3902.6,2077.4 v2(3860,2120) 3860,2178.19 Q10.2@3919.21,2237.4
  Bottom Layer w8: Q4.4@290,2247.87 290,2283.75 295.68,2289.43 464.11,2289.43 473.54,2280 v1(490,2280) 490,2296.19 500.85,2307.04 500.85,2672.96 492.65,2681.17 358.83,2681.17 320,2720 v1(290,2720) ; v1(410,690) 420,680 C26.1@420,643.9 ; C23.1@421,2079.57 C23.1@421.43,2080 ; JX1.95@1291.34,2339.85 1298.99,2347.5 1298.99,2385.02 1311.97,2398 1312.96,2398 1324.96,2410 1340,2410 1350,2400 v1(1350,2410) ; JX2.86@1448.82,416.12 1448.82,468.82 1457.07,477.07 v1(1460.61,477.07) ; JX2.85@1448.82,589.35 1448.82,658.82 v1(1450,660) ; v1(1640,90) 1640,132.6 C4.1@1657.4,150 ; v1(2456,1134) U1.2@2456,1173.82 ; C3.1@2550,324.28 2550,414.95 JX2.16@2551.18,416.12
  Bottom Layer w20: v1(1200,2180) 1203.38,2176.62 1203.38,2166.62 JX1.100@1228.34,2166.62 JX1.98@1259.84,2166.62 JX1.96@1291.34,2166.62 ; JX2.92@1354.33,416.12 1354.33,474.96 1350,479.29 1350,520.71 1354.33,525.04 JX2.91@1354.33,589.35 ; v1(1420,1960) C2.1@1470,1960 C8.1@1470,2060 1448.82,2081.18 JX1.86@1448.82,2166.62 ; JX1.85@1448.82,2339.85 1450.47,2341.5 1450.47,2387.5 1462.18,2399.22 1465.44,2399.22 1468.88,2402.67 v1(1468.88,2404.07) ; C19.1@1716.84,1072.6 C20.1@1793.9,1072.6 ; Q3.2@1780,1330 v2(1780,1390) ; v1(1793.9,1016.1) C20.1@1793.9,1072.6 ; R16.1@1861.12,1073.07 1794.37,1073.07 C20.1@1793.9,1072.6 ; C1.1@1870,2525.12 v1(1870,2600) ; C10.1@2114.97,1620 C11.1@2114.97,1697.06 2140.04,1671.99 R8.1@2190,1671.99 ; v1(2190,1740) R8.1@2190,1671.99 ; C14.1@2270,1612.94 C13.1@2270,1690 2208.01,1690 R8.1@2190,1671.99 ; v1(2353.16,1013.16) R5.1@2400,1013.16 2400.08,1013.07 R7.1@2457.38,1013.07
  other v1: 2070,-170 1880,-160 2550,250 550,320 1870,320 1980,340 1340,500 1980,670 2170,670 2360,670 2550,670 1590,680 1770,680 1920,820 1630,830 760,2050 1570,2420 1330,2920
JX1_IO00: CON5.3 JX1.9 | length 1740.1
  Bottom Layer w8: JX1.9@2645.67,2339.85 2645.67,2437.57 2576,2507.23 2576,2706 2670,2800 3500,2800 3600,2900 3600,3070 CON5.3@3650,3120
JX1_IO01: CON5.4 JX1.10 | length 1410
  Top Layer w8: v1(2650,2260) 3330.47,2940.47 3532.03,2940.47 3611.56,3020 CON5.4@3650,3020
  Bottom Layer w8: JX1.10@2645.67,2166.62 2650,2170.96 v1(2650,2260)
JX1_IO02: CON5.5 JX1.11 | length 1656.9
  Bottom Layer w8: JX1.11@2614.17,2339.85 2614.17,2443.61 2558,2499.77 2558,2713.46 2662.54,2818 3418,2818 3500,2900 3500,3070 CON5.5@3550,3120
JX1_IO03: CON5.6 JX1.12 | length 1328.7
  Top Layer w8: v1(2614.17,2260) 2614.17,2260.94 3311.7,2958.47 3450.03,2958.47 3511.56,3020 CON5.6@3550,3020
  Bottom Layer w8: JX1.12@2614.17,2166.62 2614.17,2244.17
JX1_IO04: CON5.7 JX1.13 | length 1573.6
  Bottom Layer w8: JX1.13@2582.67,2339.85 2575.02,2347.5 2575.02,2385.02 2540,2420.04 2540,2720.91 2655.09,2836 3336,2836 3400,2900 3400,3070 CON5.7@3450,3120
JX1_IO05: CON5.8 JX1.14 | length 1286.3
  Top Layer w8: v1@2580,2250 2588.17,2258.17 2588.17,2270.77 3011.4,2694 3020.77,2694 3036,2709.23 3036,2718.6 3293.87,2976.47 3368.03,2976.47 3411.56,3020 CON5.8@3450,3020
  Bottom Layer w8: v1@2580,2250 2582.67,2247.33 JX1.14@2582.67,2166.62
  other v1: 2580,2260
JX1_IO06: CON5.9 JX1.17 | length 1479.3
  Bottom Layer w8: JX1.17@2519.68,2339.85 2519.68,2726.05 2647.63,2854 3254,2854 3300,2900 3300,3070 CON5.9@3350,3120
JX1_IO07: CON5.10 JX1.18 | length 1242.3
  Top Layer w8: v1@2530,2250 2984,2704 2984,2730.77 3229.7,2976.47 3268.03,2976.47 3311.56,3020 CON5.10@3350,3020
  Bottom Layer w8: JX1.18@2519.68,2166.62 2527.33,2174.28 2527.33,2247.33 v1@2530,2250
  other v1: 2530,2260
JX1_IO08: CON5.11 JX1.19 | length 1400
  Bottom Layer w8: JX1.19@2488.19,2339.85 2495.84,2339.85 2495.84,2727.66 2640.18,2872 3152,2872 3200,2920 3200,3070 CON5.11@3250,3120
JX1_IO09: CON5.12 JX1.20 | length 1182.7
  Top Layer w8: v1@2488.19,2248.19 2488.19,2254.95 2519.23,2286 2540.54,2286 2966,2711.46 2966,2738.23 3247.77,3020 CON5.12@3250,3020
  Bottom Layer w8: JX1.20@2488.19,2166.62 v1@2488.19,2248.19
  other v1: 2488.19,2260
JX1_IO10: CON5.13 JX1.23 | length 1323.4
  Bottom Layer w8: JX1.23@2425.19,2339.85 2432.85,2339.85 2432.85,2690.13 2632.72,2890 3040,2890 3100,2950 3100,3070 CON5.13@3150,3120
JX1_IO11: CON5.14 JX1.24 | length 1153.6
  Top Layer w8: v1@2430,2250 3150,2970 CON5.14@3150,3020
  Bottom Layer w8: JX1.24@2425.19,2166.62 2425.19,2245.19 v1@2430,2250
  other v1: 2430,2260
JX1_IO12: CON5.15 JX1.25 | length 1241.1
  Bottom Layer w8: JX1.25@2393.7,2339.85 2393.7,2676.43 2625.27,2908 2948,2908 3000,2960 3000,3070 CON5.15@3050,3120
JX1_IO13: CON5.16 JX1.26 | length 1214.6
  Top Layer w8: v1@2370,2250 v1(2370,2260) 2370,2414.54 2931.95,2976.49 2968.03,2976.47 3011.56,3020 CON5.16@3050,3020
  Bottom Layer w8: v1@2370,2250 v1@2380,2260 ; 2384.27,2264.27 v1@2380,2260 ; JX1.26@2393.7,2166.62 2393.7,2246.3 v1@2380,2260
JX1_IO14: CON5.17 JX1.29 | length 1170.3
  Bottom Layer w8: JX1.29@2330.71,2339.85 2330.71,2638.9 2617.81,2926 2846,2926 2893.53,2973.53 2893.53,3063.53 CON5.17@2950,3120
JX1_IO15: CON5.18 JX1.30 | length 1110.5
  Top Layer w8: v1@2330,2250 v1(2330,2260) 2330,2400 CON5.18@2950,3020
  Bottom Layer w8: v1@2330,2250 2330.71,2249.29 JX1.30@2330.71,2166.62
JX1_IO16: CON5.19 JX1.31 | length 1110
  Bottom Layer w8: JX1.31@2299.21,2339.85 2299.21,2632.86 2610.35,2944 2784,2944 2800,2960 2800,3070 CON5.19@2850,3120
JX1_IO17: CON5.20 JX1.32 | length 1089.2
  Top Layer w8: v1@2290,2250 v1(2290,2260) 2290,2460 CON5.20@2850,3020
  Bottom Layer w8: v1@2290,2250 2299.21,2240.79 JX1.32@2299.21,2166.62
JX1_IO18: CON5.21 JX1.35 | length 1027.6
  Bottom Layer w8: JX1.35@2236.22,2339.85 2236.22,2595.32 2602.9,2962 2662,2962 2700,3000 2700,3070 CON5.21@2750,3120
JX1_IO19: CON5.22 JX1.36 | length 1066.2
  Top Layer w8: v1@2240,2250 v1(2240,2260) 2240,2510 CON5.22@2750,3020
  Bottom Layer w8: JX1.36@2236.22,2166.62 2236.22,2246.22 v1@2240,2250
JX1_IO20: CON5.23 JX1.37 | length 964.6
  Bottom Layer w8: JX1.37@2204.72,2339.85 2204.72,2613.16 2593.53,3001.97 2593.53,3063.53 CON5.23@2650,3120
JX1_IO21: CON5.24 JX1.38 | length 1041.7
  Top Layer w8: v1(2200,2260) 2200,2570 CON5.24@2650,3020
  Bottom Layer w8: v1(2200,2260) 2204.72,2255.28 JX1.38@2204.72,2166.62
JX1_IO22: CON5.25 JX1.41 | length 949.3
  Bottom Layer w8: JX1.41@2141.73,2339.85 2141.73,2601.73 2500,2960 2500,3070 CON5.25@2550,3120
JX1_IO23: CON5.26 JX1.42 | length 1026.3
  Top Layer w8: v1@2150,2250 v1(2150,2260) 2150,2620 CON5.26@2550,3020
  Bottom Layer w8: JX1.42@2141.73,2166.62 2141.73,2248.27 2143.46,2250 v1@2150,2250
JX1_IO24: CON5.27 JX1.43 | length 920.9
  Bottom Layer w8: JX1.43@2110.23,2339.85 2110.23,2610.23 2400,2900 2400,3070 CON5.27@2450,3120
JX1_IO25: CON5.28 JX1.44 | length 994.3
  Top Layer w8: v1@2110,2250 v1(2110,2260) 2110,2680 CON5.28@2450,3020
  Bottom Layer w8: v1@2110,2250 2110.23,2249.77 JX1.44@2110.23,2166.62
JX1_IO26: CON5.33 JX1.47 | length 858.8
  Bottom Layer w8: JX1.47@2047.24,2339.85 2047.24,2647.24 2193.53,2793.53 2193.53,3076.47 CON5.33@2150,3120
JX1_IO27: CON5.34 JX1.48 | length 895.9
  Top Layer w8: v1@2060,2250 v1(2060,2260) 2060,2930 CON5.34@2150,3020
  Bottom Layer w8: JX1.48@2047.24,2166.62 2047.24,2237.24 v1@2060,2250
JX1_IO28: CON5.35 JX1.49 | length 830.4
  Bottom Layer w8: JX1.49@2015.75,2339.85 2015.75,2924.19 2093.53,3001.97 2093.53,3041.56 2090,3045.08 2090,3080 CON5.35@2050,3120
JX1_IO29: CON5.36 JX1.50 | length 867.6
  Top Layer w8: v1@2020,2250 v1(2020,2260) 2020,2990 CON5.36@2050,3020
  Bottom Layer w8: JX1.50@2015.75,2166.62 2015.75,2245.75 v1@2020,2250
JX1_IO30: CON5.37 JX1.53 | length 815.1
  Bottom Layer w8: CON5.37@1950,3120 1993.53,3076.47 1993.53,3001.97 1952.75,2961.2 JX1.53@1952.75,2339.85
JX1_IO31: CON5.38 JX1.54 | length 868.8
  Top Layer w8: CON5.38@1950,3020 1970,3000 v1(1970,2260) v1@1970,2250
  Bottom Layer w8: JX1.54@1952.75,2166.62 1952.75,2222.75 1970,2240 v1@1970,2250
JX1_IO32: CON5.39 JX1.55 | length 809.7
  Bottom Layer w8: CON5.39@1850,3120 1906.47,3063.53 1906.47,3001.97 1921.26,2987.18 JX1.55@1921.26,2339.85
JX1_IO33: CON5.40 JX1.56 | length 890.1
  Top Layer w8: CON5.40@1850,3020 1930,2940 v1(1930,2260) v1@1930,2250
  Bottom Layer w8: JX1.56@1921.26,2166.62 1921.26,2238.63 1930,2247.38 v1@1930,2250
JX1_IO34: CON5.41 JX1.61 | length 811.9
  Bottom Layer w8: CON5.41@1750,3120 1806.47,3063.53 1806.47,3001.97 1826.47,2981.97 1826.47,2340.15 JX1.61@1826.77,2339.85
JX1_IO35: CON5.42 JX1.62 | length 885.2
  Top Layer w8: CON5.42@1750,3020 1750,2336.96 1823.38,2263.57 v1(1823.38,2260) v1@1823.38,2255.2
  Bottom Layer w8: v1@1823.38,2255.2 1826.77,2251.82 JX1.62@1826.77,2166.62
JX1_IO36: CON5.43 JX1.63 | length 840.3
  Bottom Layer w8: CON5.43@1650,3120 1706.47,3063.53 1706.47,3001.97 1795.27,2913.17 JX1.63@1795.27,2339.85
JX1_IO37: CON5.44 JX1.64 | length 903.6
  Top Layer w8: CON5.44@1650,3020 1650,2870.91 1716,2804.91 1716,2324 v1(1780,2260)
  Bottom Layer w8: v1@1780,2250 1780,2240 1795.27,2224.73 JX1.64@1795.27,2166.62
JX1_IO38: CON5.45 JX1.67 | length 855.7
  Bottom Layer w8: CON5.45@1550,3120 1606.47,3063.53 1606.47,3001.97 1732.28,2876.16 JX1.67@1732.28,2339.85
JX1_IO39: CON5.46 JX1.68 | length 918.9
  Top Layer w8: CON5.46@1550,3020 1550,2945.46 1698,2797.46 1698,2282 v1(1720,2260)
  Bottom Layer w8: v1@1720,2250 1732.28,2237.72 JX1.68@1732.28,2166.62
JX1_IO40: CON5.47 JX1.69 | length 884
  Bottom Layer w8: CON5.47@1450,3120 1506.47,3063.53 1506.47,2927.43 1700.78,2733.11 JX1.69@1700.78,2339.85
JX1_IO41: CON5.48 JX1.70 | length 957.3
  Top Layer w8: CON5.48@1450,3020 1680,2790 v1(1680,2260) v1@1680,2250
  Bottom Layer w8: v1@1680,2250 1700.78,2229.22 JX1.70@1700.78,2166.62
JX1_IO42: CON5.49 JX1.73 | length 899.4
  Bottom Layer w8: CON5.49@1350,3120 1406.47,3063.53 1406.47,3001.97 1637.79,2770.65 JX1.73@1637.79,2339.85
JX1_TP00: JX1.93 P2.1 | length 937.8
  Top Layer w8: P2.1@800,1850 v1(800,1950)
  Bottom Layer w8: v1(800,1950) 800,2174.54 905.46,2280 1300.5,2280 1322.83,2302.33 JX1.93@1322.83,2339.85
JX1_TP01: JX1.94 P2.2 | length 696.8
  Top Layer w8: P2.2@900,1850 v1(900,1950)
  Bottom Layer w8: v1(900,1950) 900,2050 950,2100 1300,2100 1322.83,2122.83 JX1.94@1322.83,2166.62
JX2_IO00: CON6.5 JX2.13 | length 1367.2
  Top Layer w8: v1(2582.67,527.33) 2582.67,507.33 2739.2,350.8 2864.65,350.8 3431.95,-216.49 ; 3431.97,-216.47 3468.03,-216.47 3511.56,-260 CON6.5@3550,-260
  Bottom Layer w8: v1(2582.67,527.33) JX2.13@2582.67,589.35
JX2_IO01: CON6.7 JX2.17 | length 1328.4
  Top Layer w8: v1@2519.68,530.32 v1(2519.68,527.33) 2519.68,510.32 2697.2,332.8 2857.2,332.8 CON6.7@3450,-260
  Bottom Layer w8: v1@2519.68,530.32 JX2.17@2519.68,589.35
JX2_IO02: CON6.8 JX2.19 | length 1450
  Top Layer w8: v1(2490,500) 2675.2,314.8 2849.74,314.8 3393.53,-228.98 3393.53,-265.08 3450,-321.56 CON6.8@3450,-360
  Bottom Layer w8: JX2.19@2488.19,589.35 2490,587.54 v1(2490,500)
JX2_IO03: CON6.9 JX2.20 | length 1460.7
  Bottom Layer w8: JX2.20@2488.19,416.12 2488.19,191.81 2563,117 3293,117 3350,60 CON6.9@3350,-260
JX2_IO04: CON6.10 JX2.23 | length 1443.2
  Top Layer w8: v1(2450,500) 2653.2,296.8 2842.29,296.8 3300,-160.91 3300,-310 CON6.10@3350,-360
  Bottom Layer w8: JX2.23@2425.19,589.35 2425.19,524.81 v1(2450,500)
JX2_IO05: CON6.11 JX2.24 | length 1428.7
  Bottom Layer w8: JX2.24@2425.19,416.12 2425.19,173.26 2499.46,99 3201,99 3250,50 CON6.11@3250,-260
JX2_IO06: CON6.12 JX2.25 | length 1423.3
  Top Layer w8: v1(2410,500) 2631.2,278.8 2834.83,278.8 3193.53,-79.89 3193.53,-283.53 3250,-340 CON6.12@3250,-360
  Bottom Layer w8: JX2.25@2393.7,589.35 2393.7,516.3 v1(2410,500)
JX2_IO07: CON6.13 JX2.26 | length 1340.3
  Bottom Layer w8: JX2.26@2393.7,416.12 2393.7,179.3 2492,81 3091,81 3150,22 CON6.13@3150,-260
JX2_IO08: CON6.14 JX2.29 | length 1416.5
  Top Layer w8: v1(2370,500) 2609.2,260.8 2827.37,260.8 3106.47,-18.3 3106.47,-278.03 3150,-321.56 CON6.14@3150,-360
  Bottom Layer w8: JX2.29@2330.71,589.35 2330.71,539.29 v1(2370,500)
JX2_IO09: CON6.15 JX2.30 | length 1322.3
  Bottom Layer w8: JX2.30@2330.71,416.12 2330.71,134.75 2402.46,63 2997,63 3050,10 CON6.15@3050,-260
JX2_IO10: CON6.16 JX2.31 | length 1402.5
  Top Layer w8: v1(2320,500) 2544,276 2560.77,276 2576,260.77 2593.97,242.8 2819.92,242.8 3006.47,56.25 3006.47,-278.03 3050,-321.56 CON6.16@3050,-360
  Bottom Layer w8: JX2.31@2299.21,589.35 2299.21,520.79 v1(2320,500)
JX2_IO11: CON6.17 JX2.32 | length 1238.6
  Bottom Layer w8: JX2.32@2299.21,416.12 2299.21,140.79 2395,45 2895,45 2950,-10 CON6.17@2950,-260
JX2_IO12: CON6.18 JX2.35 | length 1406.2
  Top Layer w8: v1(2270,500) 2270,493.23 2539.23,224 2560.77,224 2561.57,224.8 2812.46,224.8 2906.47,130.79 2906.47,-316.47 CON6.18@2950,-360
  Bottom Layer w8: JX2.35@2236.22,589.35 2236.22,533.78 v1(2270,500)